# Altium PCB CH32H417QEU-R1.PcbDoc (part 2 of 6)
Units mm, origin at the board's own origin, x right, y up, seen from the top; angles counter-clockwise.
Board outline 125 x 85 mm, 4 copper layers (Top Layer, Layer 1, Layer 2, Bottom Layer), stack 0.603 mm thick; 271 components, 256 nets, 1068 pads, 903 vias.
Unrouted connection lines stored in the file: 143.
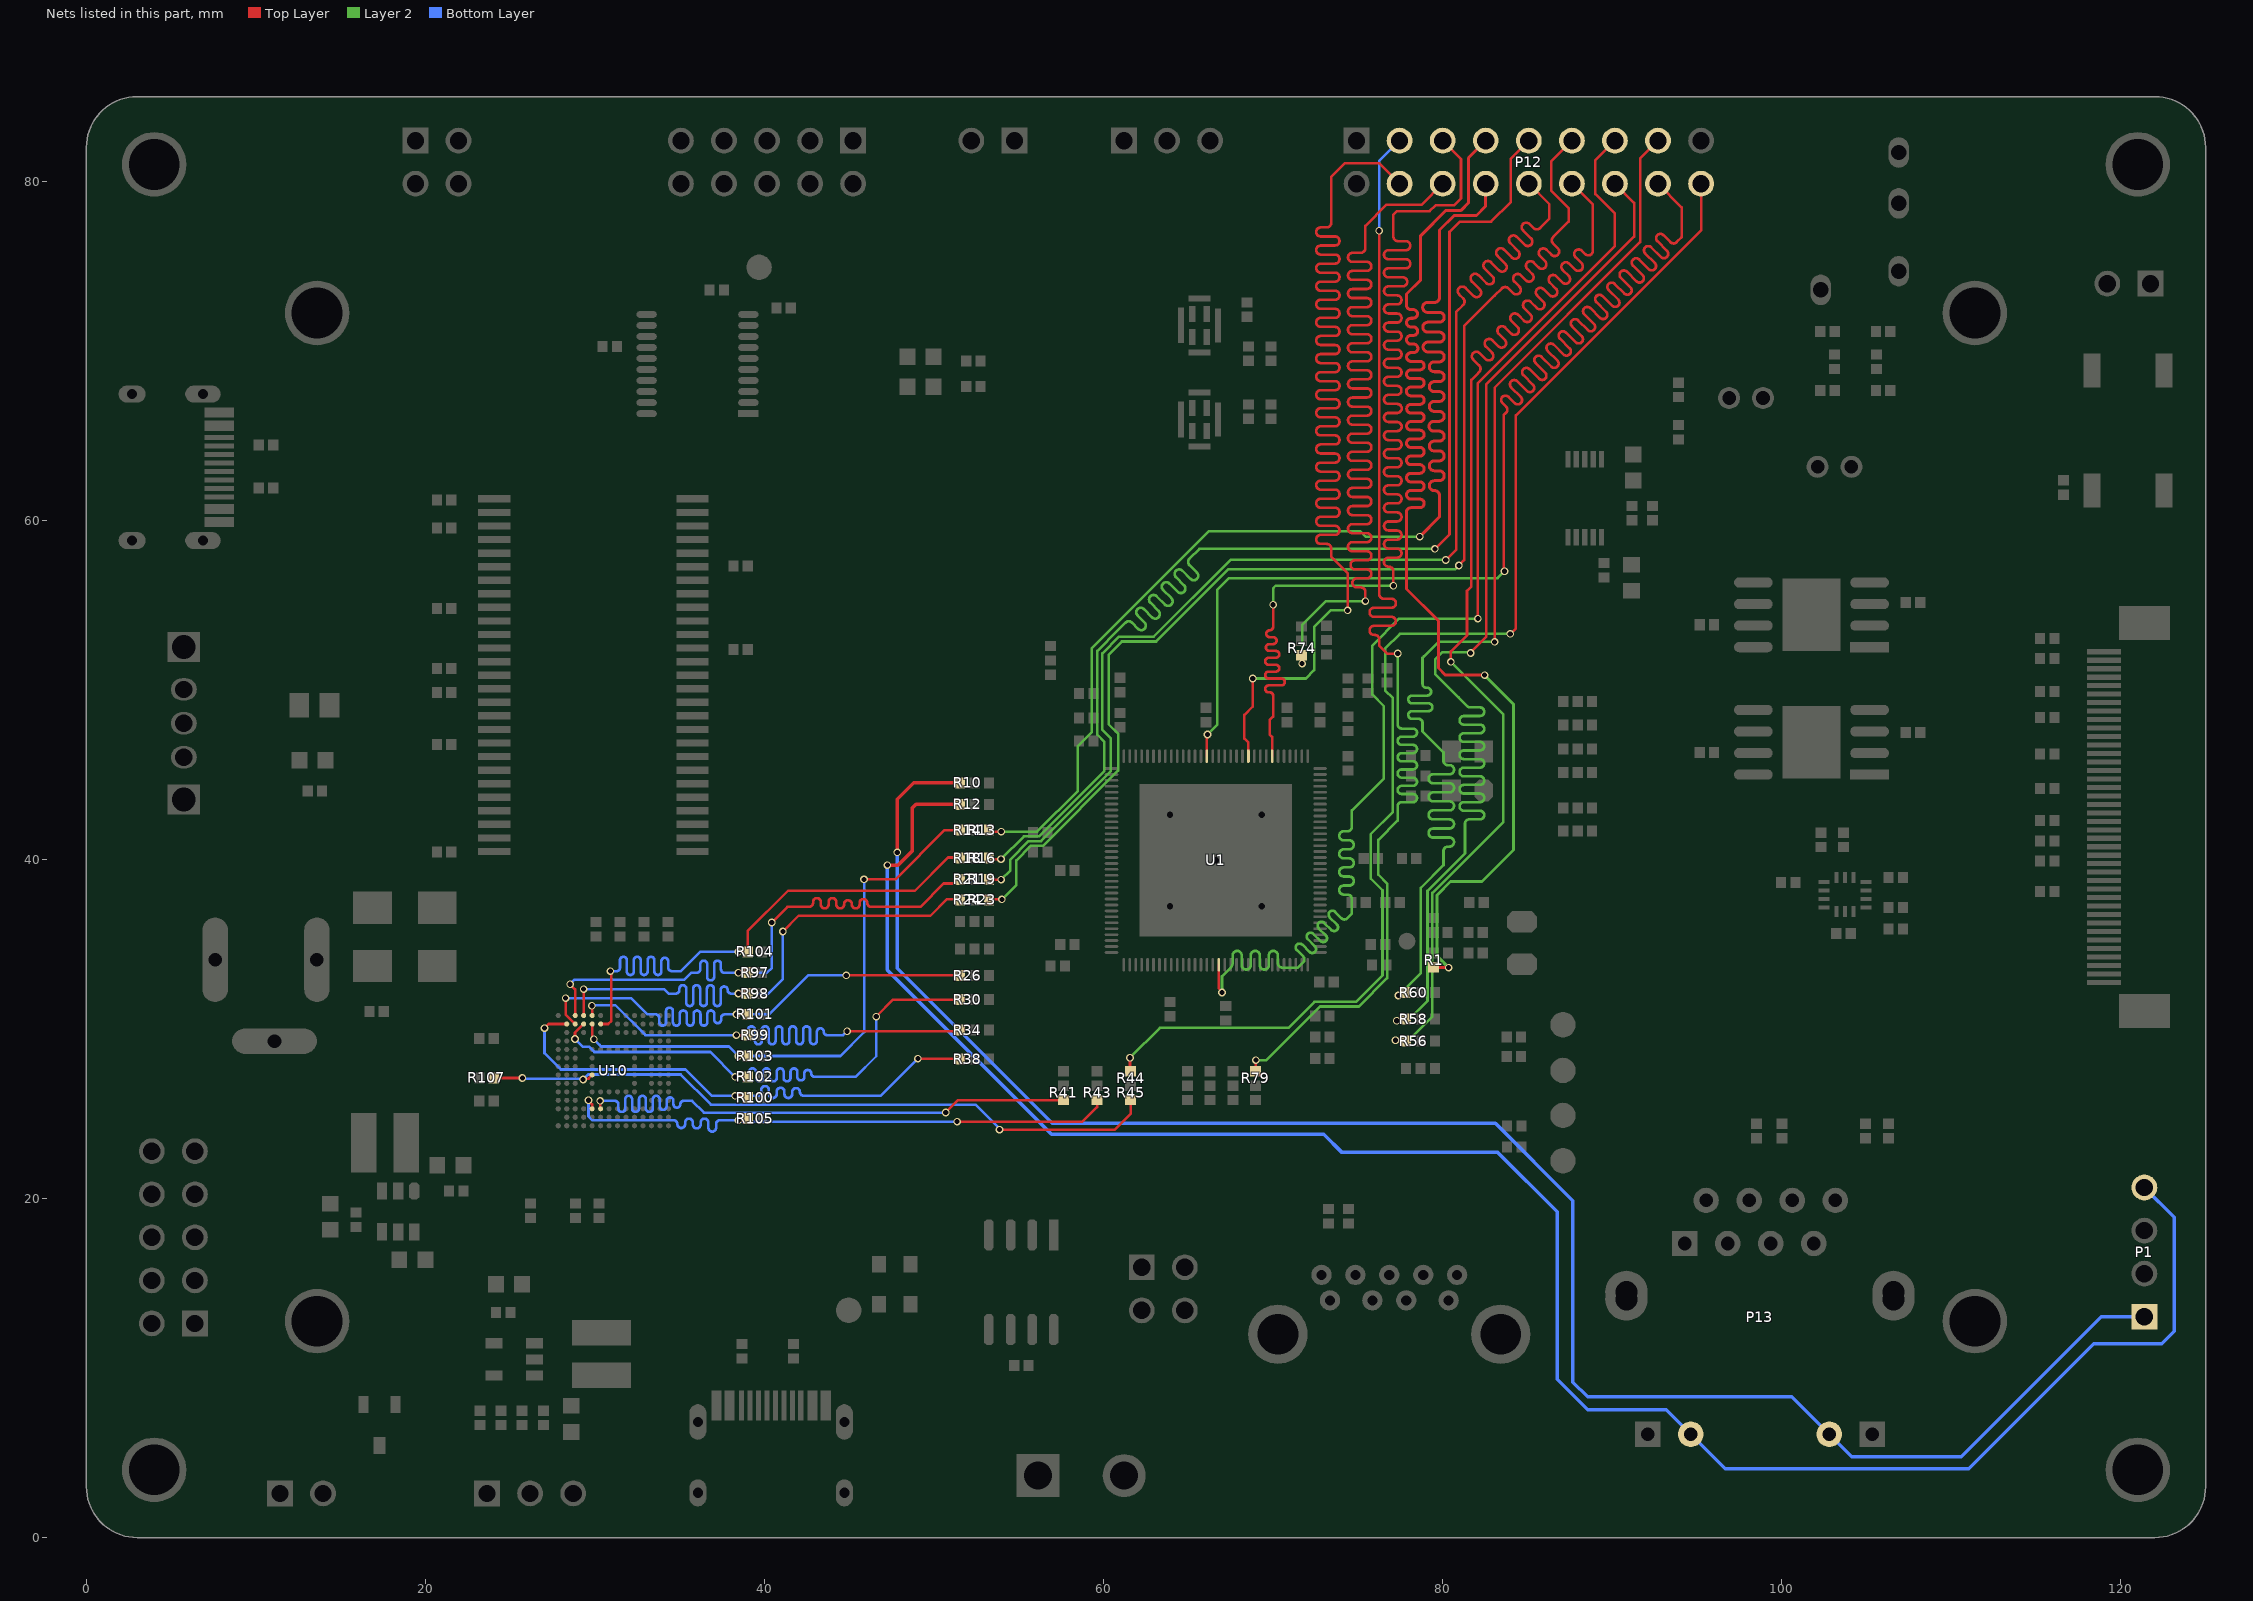
[diagram p4: the nets of this part, all layers, seen from the top]

## Via types
v1: diameter 0.45, hole 0.3, Top Layer to Bottom Layer, tented both sides, 534 vias
v2: diameter 0.5, hole 0.3, Top Layer to Bottom Layer, tented both sides, 320 vias
v3: diameter 0.711, hole 0.406, Top Layer to Bottom Layer, tented both sides, 24 vias
v4: diameter 0.508, hole 0.305, Top Layer to Bottom Layer, tented both sides, 22 vias
v5: diameter 0.7, hole 0.4, Top Layer to Bottom Layer, tented both sides, 3 vias

## Nets (pads, with @x,y where several pads share a name; then routed paths per layer and width w, separated by ;. In a path a pad name is that pad's centre, name@x,y a point inside that pad or via, vN(x,y) a via of type N, cw(c..) or ccw(c..) an arc to the next point about the centre after c; other vN are vias at no path point) (continued)
DVP_D0: P12.8 R13.1 | length 74.9
  Top Layer w0.152: R13.1@53.237,41.725 53.322,41.641 v1(53.96,41.641)
  Top Layer w0.178: v1(78.645,59.041) 79.811,60.207 79.811,61.376 79.811,61.465 ccw(c79.519,61.465) 79.519,61.757 79.504,61.757 cw(c79.504,62.05) 79.504,62.342 79.8,62.342 ccw(c79.8,62.634) 79.8,62.926 79.504,62.926 cw(c79.504,63.218) 79.504,63.51 79.8,63.51 ccw(c79.8,63.802) 79.8,64.094 79.504,64.094 cw(c79.504,64.386) 79.504,64.678 79.8,64.678 ccw(c79.8,64.971) 79.8,65.263 79.49,65.263 cw(c79.49,65.555) 79.49,65.847 79.8,65.847 ccw(c79.8,66.139) 79.8,66.431 79.504,66.431 cw(c79.504,66.723) 79.504,67.015 79.8,67.015 ccw(c79.8,67.307) 79.8,67.599 79.504,67.599 cw(c79.504,67.892) 79.504,68.184 79.8,68.184 ccw(c79.8,68.476) 79.8,68.768 79.504,68.768 cw(c79.504,69.06) 79.504,69.352 79.8,69.352 ccw(c79.8,69.644) 79.8,69.936 79.134,69.936 cw(c79.134,70.228) 79.134,70.52 79.8,70.52 ccw(c79.8,70.813) 79.8,71.105 79.118,71.105 cw(c79.118,71.397) 79.118,71.689 79.8,71.689 ccw(c79.8,71.981) 79.8,72.273 79.109,72.273 cw(c79.109,72.565) 79.109,72.857 79.519,72.857 ccw(c79.519,73.149) 79.811,73.149 79.811,74.34 79.811,77.123 80.677,77.989 81.994,77.989 82.517,78.511 P12.8@82.517,79.86
  Layer 2 w0.152: v1(53.96,41.641) 56.073,41.641 58.481,44.048 58.481,46.686 59.304,47.51 59.304,52.464 66.195,59.355 75.141,59.355 75.455,59.041 v1(78.645,59.041)
DVP_D1: P12.9 R16.1 | length 75.6
  Top Layer w0.152: R16.1@53.237,40.074 53.294,40.018 v1(53.949,40.018) ; v1(79.54,58.321) 80.399,59.18 80.399,77.018 81.008,77.627 82.862,77.627 84.02,78.785 84.02,81.34 P12.9@85.08,82.4
  Layer 2 w0.152: v1(53.949,40.018) 55.293,41.361 56.189,41.361 60.044,45.216 60.044,46.94 59.627,47.357 59.627,52.305 60.86,53.539 61.291,53.97 cw(c61.479,53.781) 61.668,53.97 62.032,53.606 ccw(c62.22,53.795) 62.409,53.606 ccw(c62.22,53.795) 62.409,53.983 62.002,54.39 cw(c62.191,54.578) 62.002,54.767 cw(c62.191,54.578) 62.379,54.767 62.861,54.285 ccw(c63.05,54.473) 63.239,54.285 ccw(c63.05,54.473) 63.239,54.662 62.757,55.144 cw(c62.945,55.333) 62.757,55.521 cw(c62.945,55.333) 63.134,55.521 63.616,55.039 ccw(c63.804,55.228) 63.993,55.039 ccw(c63.804,55.228) 63.993,55.416 63.511,55.898 cw(c63.7,56.087) 63.511,56.276 cw(c63.7,56.087) 63.888,56.276 64.37,55.794 ccw(c64.559,55.982) 64.747,55.794 ccw(c64.559,55.982) 64.747,56.171 64.265,56.653 cw(c64.454,56.841) 64.265,57.03 cw(c64.454,56.841) 64.643,57.03 65.124,56.548 ccw(c65.313,56.737) 65.502,56.548 ccw(c65.313,56.737) 65.502,56.925 65.063,57.364 cw(c65.251,57.553) 65.063,57.741 65.642,58.321 65.669,58.321 74.031,58.321 v1(79.54,58.321)
DVP_D2: P12.10 R19.1 | length 76.1
  Top Layer w0.152: R19.1@53.237,38.829 53.252,38.814 v1(53.956,38.814) ; v1(80.182,57.667) 80.812,58.296 80.812,72.314 81.159,72.661 81.213,72.715 ccw(c81.024,72.904) 81.213,73.092 80.968,73.337 cw(c81.157,73.526) 80.968,73.714 cw(c81.157,73.526) 81.345,73.714 81.815,73.245 ccw(c82.003,73.433) 82.192,73.245 ccw(c82.003,73.433) 82.192,73.622 81.722,74.092 cw(c81.911,74.28) 81.722,74.469 cw(c81.911,74.28) 82.099,74.469 82.569,73.999 ccw(c82.758,74.188) 82.946,73.999 ccw(c82.758,74.188) 82.946,74.376 82.477,74.846 cw(c82.665,75.034) 82.477,75.223 cw(c82.665,75.034) 82.854,75.223 83.323,74.753 ccw(c83.512,74.942) 83.701,74.753 ccw(c83.512,74.942) 83.701,75.131 83.231,75.6 cw(c83.42,75.789) 83.231,75.977 cw(c83.42,75.789) 83.608,75.977 84.078,75.508 ccw(c84.266,75.696) 84.455,75.508 ccw(c84.266,75.696) 84.455,75.885 83.985,76.355 cw(c84.174,76.543) 83.985,76.732 cw(c84.174,76.543) 84.362,76.732 84.832,76.262 ccw(c85.021,76.451) 85.209,76.262 ccw(c85.021,76.451) 85.209,76.639 84.74,77.109 cw(c84.928,77.298) 84.74,77.486 cw(c84.928,77.298) 85.117,77.486 85.362,77.241 ccw(c85.551,77.43) 85.739,77.241 86.293,77.795 86.293,78.647 P12.10@85.08,79.86
  Layer 2 w0.152: v1(53.956,38.814) 54.496,39.354 54.496,39.995 55.582,41.082 56.305,41.082 60.432,45.209 60.432,47.143 59.931,47.645 59.931,52.153 60.916,53.138 62.956,53.138 67.491,57.673 80.176,57.673 v1(80.182,57.667)
DVP_D3: P12.11 R23.1 | length 75.9
  Top Layer w0.152: R23.1@53.237,37.62 53.268,37.65 v1(53.999,37.65) ; v1(80.956,57.341) 81.269,57.654 81.269,71.462 83.064,73.257 83.495,73.688 cw(c83.683,73.499) 83.872,73.688 84.152,73.408 ccw(c84.34,73.597) 84.529,73.408 ccw(c84.34,73.597) 84.529,73.785 84.235,74.079 cw(c84.424,74.268) 84.235,74.456 cw(c84.424,74.268) 84.612,74.456 84.906,74.162 ccw(c85.095,74.351) 85.283,74.162 ccw(c85.095,74.351) 85.283,74.54 84.989,74.833 cw(c85.178,75.022) 84.989,75.21 cw(c85.178,75.022) 85.367,75.21 85.66,74.917 ccw(c85.849,75.105) 86.038,74.917 ccw(c85.849,75.105) 86.038,75.294 85.744,75.588 cw(c85.932,75.776) 85.744,75.965 cw(c85.932,75.776) 86.121,75.965 86.415,75.671 ccw(c86.603,75.86) 86.792,75.671 ccw(c86.603,75.86) 86.792,76.048 86.512,76.328 cw(c86.701,76.516) 86.512,76.705 87.425,77.618 87.425,78.422 86.406,79.441 86.406,81.186 P12.11@87.62,82.4
  Layer 2 w0.152: v1(53.999,37.65) 54.848,38.498 54.848,39.952 55.698,40.803 56.421,40.803 60.854,45.236 60.854,47.417 60.295,47.977 60.295,52.073 61.081,52.859 63.093,52.859 67.341,57.107 80.721,57.107 v1(80.956,57.341)
DVP_D4: P12.12 R56.1 | length 74.1
  Top Layer w0.152: v1(77.215,29.336) 77.79,29.336 R56.1@77.844,29.282 ; v1(80.484,51.656) 80.484,52.269 81.436,53.22 81.436,55.842 81.689,56.095 81.689,68.292 82.102,68.705 82.156,68.759 ccw(c81.967,68.948) 82.156,69.136 81.8,69.492 cw(c81.988,69.681) 81.8,69.869 cw(c81.988,69.681) 82.177,69.869 82.534,69.513 ccw(c82.722,69.701) 82.911,69.513 ccw(c82.722,69.701) 82.911,69.89 82.554,70.246 cw(c82.743,70.435) 82.554,70.624 cw(c82.743,70.435) 82.931,70.624 83.288,70.267 ccw(c83.476,70.456) 83.665,70.267 ccw(c83.476,70.456) 83.665,70.644 83.309,71.001 cw(c83.497,71.189) 83.309,71.378 cw(c83.497,71.189) 83.686,71.378 84.042,71.021 ccw(c84.231,71.21) 84.419,71.021 ccw(c84.231,71.21) 84.419,71.399 84.063,71.755 cw(c84.251,71.944) 84.063,72.132 cw(c84.251,71.944) 84.44,72.132 84.797,71.776 ccw(c84.985,71.964) 85.174,71.776 ccw(c84.985,71.964) 85.174,72.153 84.817,72.509 cw(c85.006,72.698) 84.817,72.887 cw(c85.006,72.698) 85.194,72.887 85.551,72.53 ccw(c85.74,72.719) 85.928,72.53 ccw(c85.74,72.719) 85.928,72.907 85.572,73.264 cw(c85.76,73.452) 85.572,73.641 cw(c85.76,73.452) 85.949,73.641 86.305,73.284 ccw(c86.494,73.473) 86.682,73.284 ccw(c86.494,73.473) 86.682,73.662 86.326,74.018 cw(c86.514,74.207) 86.326,74.395 cw(c86.514,74.207) 86.703,74.395 87.06,74.039 ccw(c87.248,74.227) 87.437,74.039 ccw(c87.248,74.227) 87.437,74.416 87.08,74.773 cw(c87.269,74.961) 87.08,75.15 cw(c87.269,74.961) 87.457,75.15 87.814,74.793 ccw(c88.003,74.982) 88.191,74.793 ccw(c88.003,74.982) 88.191,75.17 87.835,75.527 cw(c88.023,75.715) 87.835,75.904 cw(c88.023,75.715) 88.212,75.904 88.405,75.711 ccw(c88.594,75.899) 88.86,75.899 88.86,76.696 88.86,78.62 P12.12@87.387,80.093
  Layer 2 w0.152: v1(77.215,29.336) 77.99,29.336 79.385,30.732 79.385,38.031 83.576,42.222 83.576,48.564 v1(80.484,51.656)
DVP_D5: P12.13 U1.113 | length 84.8
  Top Layer w0.152: U1.113@66.791,33.792 66.791,32.397 66.985,32.203 v1(66.985,32.156) ; v1(82.073,54.203) 82.065,54.211 82.065,56.076 82.074,56.086 82.074,68.1 90.16,76.186 90.16,78.092 89.006,79.246 89.006,81.246 P12.13@90.16,82.4
  Layer 2 w0.152: v1(66.985,32.156) 66.985,33.103 67.401,33.519 67.477,33.595 ccw(c67.155,33.917) 67.61,33.917 67.61,34.342 cw(c67.877,34.342) 68.144,34.342 68.144,33.774 ccw(c68.41,33.774) 68.677,33.774 68.677,34.342 cw(c68.944,34.342) 69.21,34.342 69.21,33.774 ccw(c69.477,33.774) 69.744,33.774 69.744,34.342 cw(c70.011,34.342) 70.277,34.342 70.277,33.888 ccw(c70.544,33.888) 70.544,33.622 70.896,33.622 71.458,33.622 71.724,33.888 71.778,33.942 ccw(c71.617,34.103) 71.778,34.265 71.395,34.648 cw(c71.557,34.81) 71.395,34.971 cw(c71.557,34.81) 71.719,34.971 72.144,34.546 ccw(c72.305,34.708) 72.467,34.546 ccw(c72.305,34.708) 72.467,34.869 72.042,35.295 cw(c72.204,35.456) 72.042,35.618 cw(c72.204,35.456) 72.365,35.618 72.79,35.193 ccw(c72.952,35.354) 73.114,35.193 ccw(c72.952,35.354) 73.114,35.516 72.689,35.941 cw(c72.85,36.103) 72.689,36.264 cw(c72.85,36.103) 73.012,36.264 73.437,35.839 ccw(c73.599,36.001) 73.76,35.839 ccw(c73.599,36.001) 73.76,36.163 73.335,36.588 cw(c73.497,36.749) 73.335,36.911 cw(c73.497,36.749) 73.658,36.911 74.041,36.528 ccw(c74.203,36.69) 74.365,36.528 74.599,36.763 74.648,36.811 74.648,37.587 74.648,37.663 ccw(c74.381,37.663) 74.381,37.929 74.163,37.929 cw(c74.163,38.196) 74.163,38.463 74.492,38.463 ccw(c74.492,38.73) 74.492,38.996 74.163,38.996 cw(c74.163,39.263) 74.163,39.53 74.492,39.53 ccw(c74.492,39.796) 74.492,40.063 74.163,40.063 cw(c74.163,40.33) 74.163,40.596 74.492,40.596 ccw(c74.492,40.863) 74.492,41.13 74.163,41.13 cw(c74.163,41.397) 74.163,41.663 74.381,41.663 ccw(c74.381,41.93) 74.648,41.93 74.648,42.698 74.648,42.889 76.531,44.772 76.531,49.038 75.849,49.719 75.849,52.617 77.435,54.203 v1(82.073,54.203)
DVP_D6: P12.14 R58.1 | length 75.8
  Top Layer w0.152: v1(77.291,30.488) 77.754,30.488 R58.1@77.844,30.578 ; v1(81.647,52.177) 81.647,52.217 82.559,53.128 82.559,68.004 91.298,76.743 91.298,78.722 P12.14@90.16,79.86
  Layer 2 w0.152: v1(77.291,30.488) 77.939,30.488 79.106,31.655 79.106,38.147 81.314,40.355 81.314,41.528 81.314,42.112 cw(c81.568,42.112) 81.568,42.366 82.196,42.366 ccw(c82.196,42.62) 82.196,42.874 81.25,42.874 cw(c81.25,43.128) 81.25,43.382 82.196,43.382 ccw(c82.196,43.636) 82.196,43.89 81.25,43.89 cw(c81.25,44.144) 81.25,44.398 82.196,44.398 ccw(c82.196,44.652) 82.196,44.906 81.25,44.906 cw(c81.25,45.16) 81.25,45.414 82.196,45.414 ccw(c82.196,45.668) 82.196,45.922 81.25,45.922 cw(c81.25,46.176) 81.25,46.43 82.196,46.43 ccw(c82.196,46.684) 82.196,46.938 81.25,46.938 cw(c81.25,47.192) 81.25,47.446 82.196,47.446 ccw(c82.196,47.7) 82.196,47.954 81.25,47.954 cw(c81.25,48.208) 81.25,48.462 82.196,48.462 ccw(c82.196,48.716) 82.196,48.97 81.623,48.97 cw(c81.623,49.224) 81.444,49.044 80.931,49.557 79.551,50.936 79.551,51.803 79.965,52.216 81.608,52.216 v1(81.647,52.177)
DVP_D7: P12.15 R60.1 | length 75.8
  Top Layer w0.152: v1(77.39,31.977) 77.674,31.977 R60.1@77.844,32.147 ; v1(83.062,52.833) 83.062,67.824 91.65,76.413 91.65,81.35 P12.15@92.7,82.4
  Layer 2 w0.152: v1(77.39,31.977) 78.718,33.305 78.718,38.333 80.046,39.661 80.046,39.884 80.046,40.494 cw(c80.313,40.494) 80.313,40.761 80.406,40.761 ccw(c80.406,41.027) 80.406,41.294 79.438,41.294 cw(c79.438,41.561) 79.438,41.827 80.406,41.827 ccw(c80.406,42.094) 80.406,42.361 79.438,42.361 cw(c79.438,42.628) 79.438,42.894 80.406,42.894 ccw(c80.406,43.161) 80.406,43.428 79.438,43.428 cw(c79.438,43.694) 79.438,43.961 80.406,43.961 ccw(c80.406,44.228) 80.406,44.494 79.438,44.494 cw(c79.438,44.761) 79.438,45.028 80.406,45.028 ccw(c80.406,45.295) 80.406,45.561 80.313,45.561 cw(c80.313,45.828) 80.046,45.828 80.046,46.323 78.81,47.56 78.81,47.991 78.81,48.067 ccw(c78.581,48.067) 78.581,48.295 78.201,48.295 cw(c78.201,48.524) 78.201,48.753 79.166,48.753 ccw(c79.166,48.981) 79.166,49.21 78.201,49.21 cw(c78.201,49.438) 78.201,49.667 79.089,49.667 ccw(c79.089,49.896) 79.089,50.124 79.039,50.124 cw(c79.039,50.353) 78.81,50.353 78.81,51.889 78.898,51.977 79.754,52.833 v1(83.062,52.833)
DVP_HSYNC: P12.5 U1.39 | length 84.9
  Top Layer w0.152: U1.39@69.941,46.092 69.941,47.236 69.795,47.383 69.795,48.225 70,48.43 70,49.581 70,49.658 ccw(c69.797,49.658) 69.797,49.861 69.733,49.861 cw(c69.733,50.064) 69.733,50.267 70.482,50.267 ccw(c70.482,50.471) 70.482,50.674 69.733,50.674 cw(c69.733,50.877) 69.733,51.08 70.157,51.08 ccw(c70.157,51.283) 70.157,51.487 69.733,51.487 cw(c69.733,51.69) 69.733,51.893 70.157,51.893 ccw(c70.157,52.096) 70.157,52.299 69.773,52.299 cw(c69.773,52.503) 69.773,52.706 70,52.706 ccw(c70,52.909) 70,53.112 69.797,53.112 cw(c69.797,53.315) 69.797,53.519 ccw(c69.797,53.722) 70,53.722 70,54.235 70,55.025 v1(69.998,55.027) ; v1(77.092,56.146) 77.092,56.927 77.092,57.003 ccw(c76.825,57.003) 76.825,57.27 76.805,57.27 cw(c76.805,57.536) 76.805,57.803 77.307,57.803 ccw(c77.307,58.07) 77.307,58.336 76.805,58.336 cw(c76.805,58.603) 76.805,58.87 77.307,58.87 ccw(c77.307,59.136) 77.307,59.403 76.805,59.403 cw(c76.805,59.67) 76.805,59.937 77.307,59.937 ccw(c77.307,60.203) 77.307,60.47 76.805,60.47 cw(c76.805,60.737) 76.805,61.003 77.307,61.003 ccw(c77.307,61.27) 77.307,61.537 76.805,61.537 cw(c76.805,61.803) 76.805,62.07 77.307,62.07 ccw(c77.307,62.337) 77.307,62.604 76.805,62.604 cw(c76.805,62.87) 76.805,63.137 77.307,63.137 ccw(c77.307,63.404) 77.307,63.67 76.805,63.67 cw(c76.805,63.937) 76.805,64.204 77.307,64.204 ccw(c77.307,64.47) 77.307,64.737 76.805,64.737 cw(c76.805,65.004) 76.805,65.271 77.313,65.271 ccw(c77.313,65.537) 77.313,65.804 76.805,65.804 cw(c76.805,66.071) 76.805,66.337 77.315,66.337 ccw(c77.315,66.604) 77.315,66.871 76.805,66.871 cw(c76.805,67.137) 76.805,67.404 77.3,67.404 ccw(c77.3,67.671) 77.3,67.938 76.805,67.938 cw(c76.805,68.204) 76.805,68.471 77.307,68.471 ccw(c77.307,68.738) 77.307,69.004 76.805,69.004 cw(c76.805,69.271) 76.805,69.538 77.307,69.538 ccw(c77.307,69.804) 77.307,70.071 76.805,70.071 cw(c76.805,70.338) 76.805,70.605 77.307,70.605 ccw(c77.307,70.871) 77.307,71.138 76.805,71.138 cw(c76.805,71.405) 76.805,71.671 77.307,71.671 ccw(c77.307,71.938) 77.307,72.205 76.805,72.205 cw(c76.805,72.471) 76.805,72.738 77.307,72.738 ccw(c77.307,73.005) 77.307,73.272 76.805,73.272 cw(c76.805,73.538) 76.805,73.805 77.644,73.805 ccw(c77.644,74.072) 77.644,74.338 76.805,74.338 cw(c76.805,74.605) 76.805,74.872 77.824,74.872 ccw(c77.824,75.138) 77.824,75.405 76.805,75.405 cw(c76.805,75.672) 76.805,75.939 77.824,75.939 ccw(c77.824,76.205) 77.824,76.472 77.359,76.472 cw(c77.359,76.739) 77.092,76.739 77.092,77.862 77.092,78.032 77.298,78.239 79.232,78.239 79.579,78.585 80.674,78.585 81.082,78.994 81.082,81.318 P12.5@80,82.4
  Layer 2 w0.152: v1(69.998,55.027) 69.998,55.997 70.147,56.146 v1(77.092,56.146)
DVP_PCLK: P12.16 U1.50 | length 84.9
  Top Layer w0.152: U1.50@66.091,46.092 66.091,47.336 v1(66.129,47.373) ; v1(83.648,57.003) 83.596,57.056 83.596,66.208 83.685,66.298 83.739,66.352 ccw(c83.559,66.531) 83.739,66.711 83.521,66.929 cw(c83.7,67.109) 83.521,67.288 cw(c83.7,67.109) 83.88,67.288 84.249,66.92 ccw(c84.428,67.099) 84.608,66.92 ccw(c84.428,67.099) 84.608,67.279 84.041,67.846 cw(c84.22,68.026) 84.041,68.205 cw(c84.22,68.026) 84.4,68.205 84.967,67.638 ccw(c85.147,67.818) 85.326,67.638 ccw(c85.147,67.818) 85.326,67.997 84.759,68.564 cw(c84.939,68.744) 84.759,68.924 cw(c84.939,68.744) 85.118,68.924 85.686,68.356 ccw(c85.865,68.536) 86.045,68.356 ccw(c85.865,68.536) 86.045,68.716 85.478,69.283 cw(c85.657,69.462) 85.478,69.642 cw(c85.657,69.462) 85.837,69.642 86.404,69.075 ccw(c86.584,69.254) 86.763,69.075 ccw(c86.584,69.254) 86.763,69.434 86.196,70.001 cw(c86.376,70.181) 86.196,70.36 cw(c86.376,70.181) 86.555,70.36 87.122,69.793 ccw(c87.302,69.973) 87.482,69.793 ccw(c87.302,69.973) 87.482,70.152 86.914,70.72 cw(c87.094,70.899) 86.914,71.079 cw(c87.094,70.899) 87.274,71.079 87.841,70.512 ccw(c88.02,70.691) 88.2,70.512 ccw(c88.02,70.691) 88.2,70.871 87.633,71.438 cw(c87.812,71.618) 87.633,71.797 cw(c87.812,71.618) 87.992,71.797 88.559,71.23 ccw(c88.739,71.41) 88.918,71.23 ccw(c88.739,71.41) 88.918,71.589 88.351,72.157 cw(c88.531,72.336) 88.351,72.516 cw(c88.531,72.336) 88.71,72.516 89.278,71.949 ccw(c89.457,72.128) 89.637,71.949 ccw(c89.457,72.128) 89.637,72.308 89.07,72.875 cw(c89.249,73.055) 89.07,73.234 cw(c89.249,73.055) 89.429,73.234 89.996,72.667 ccw(c90.176,72.847) 90.355,72.667 ccw(c90.176,72.847) 90.355,73.026 89.788,73.593 cw(c89.968,73.773) 89.788,73.953 cw(c89.968,73.773) 90.147,73.953 90.714,73.385 ccw(c90.894,73.565) 91.074,73.385 ccw(c90.894,73.565) 91.074,73.745 90.507,74.312 cw(c90.686,74.491) 90.507,74.671 cw(c90.686,74.491) 90.866,74.671 91.433,74.104 ccw(c91.613,74.283) 91.792,74.104 ccw(c91.613,74.283) 91.792,74.463 91.225,75.03 cw(c91.405,75.21) 91.225,75.389 cw(c91.405,75.21) 91.584,75.389 92.151,74.822 ccw(c92.331,75.002) 92.511,74.822 ccw(c92.331,75.002) 92.511,75.181 91.943,75.749 cw(c92.123,75.928) 91.943,76.108 cw(c92.123,75.928) 92.303,76.108 92.87,75.541 ccw(c93.049,75.72) 93.229,75.541 ccw(c93.049,75.72) 93.229,75.9 92.662,76.467 cw(c92.841,76.647) 92.662,76.826 cw(c92.841,76.647) 93.021,76.826 93.438,76.41 ccw(c93.617,76.589) 93.797,76.41 94.072,76.684 94.095,76.708 94.095,78.465 P12.16@92.7,79.86
  Layer 2 w0.152: v1(66.129,47.373) 66.7,47.945 66.7,55.901 67.398,56.599 83.245,56.599 v1(83.648,57.003)
DVP_PWDN: P12.18 R44.1 | length 77
  Top Layer w0.152: v1(61.554,28.306) 61.554,27.546 R44.1@61.594,27.507 ; v1(83.985,53.305) 84.312,53.632 84.312,66.186 95.24,77.113 P12.18@95.24,79.86
  Layer 2 w0.152: v1(61.554,28.306) 63.318,30.07 70.893,30.07 72.428,31.605 74.884,31.605 76.449,33.17 76.449,38.184 75.757,38.875 75.757,41.5 77.064,42.806 77.064,49.517 76.604,49.977 76.604,52.437 77.472,53.305 82.253,53.305 v1(83.985,53.305)
DVP_RESET: P12.7 R1.1 | length 77
  Top Layer w0.178: R1.1@79.46,33.617 v1(80.349,33.617) ; v1(82.472,50.871) 80.168,50.871 79.747,51.292 79.747,54.075 77.866,55.956 77.866,58.881 77.866,60.494 cw(c78.12,60.494) 78.12,60.748 78.653,60.748 ccw(c78.653,61.002) 78.653,61.256 78.12,61.256 cw(c78.12,61.51) 78.12,61.764 78.653,61.764 ccw(c78.653,62.018) 78.653,62.272 78.12,62.272 cw(c78.12,62.526) 78.12,62.78 78.653,62.78 ccw(c78.653,63.034) 78.653,63.288 78.12,63.288 cw(c78.12,63.542) 78.12,63.796 78.653,63.796 ccw(c78.653,64.05) 78.653,64.304 78.12,64.304 cw(c78.12,64.558) 78.12,64.812 78.653,64.812 ccw(c78.653,65.066) 78.653,65.32 78.126,65.32 cw(c78.126,65.574) 78.126,65.828 78.653,65.828 ccw(c78.653,66.082) 78.653,66.336 78.128,66.336 cw(c78.128,66.59) 78.128,66.844 78.653,66.844 ccw(c78.653,67.098) 78.653,67.352 78.113,67.352 cw(c78.113,67.606) 78.113,67.86 78.653,67.86 ccw(c78.653,68.114) 78.653,68.368 78.119,68.368 cw(c78.119,68.622) 78.119,68.876 78.653,68.876 ccw(c78.653,69.13) 78.653,69.384 78.12,69.384 cw(c78.12,69.638) 78.12,69.892 78.283,69.892 ccw(c78.283,70.146) 78.283,70.4 78.12,70.4 cw(c78.12,70.654) 78.12,70.908 78.267,70.908 ccw(c78.267,71.162) 78.267,71.416 78.12,71.416 cw(c78.12,71.67) 78.12,71.924 78.258,71.924 ccw(c78.258,72.178) 78.258,72.432 78.12,72.432 cw(c78.12,72.686) 77.866,72.686 77.866,73.318 77.866,73.348 78.703,74.185 78.703,76.798 80.199,78.293 81.09,78.293 81.527,78.73 81.527,81.387 P12.7@82.701,82.561
  Layer 2 w0.178: v1(80.349,33.617) 79.677,34.29 79.677,37.91 80.467,38.7 82.317,38.7 84.173,40.557 84.173,49.161 82.472,50.862 v1(82.472,50.871)
DVP_SCL: P12.4 U1.43 | length 84.9
  Top Layer w0.152: U1.43@68.541,46.092 68.541,46.891 68.307,47.126 68.307,48.53 68.797,49.02 v1(68.797,50.675) ; v1(74.393,54.692) 74.393,56.89 73.424,57.86 73.424,58.269 73.424,58.345 ccw(c73.157,58.345) 73.157,58.612 72.805,58.612 cw(c72.805,58.879) 72.805,59.145 73.65,59.145 ccw(c73.65,59.412) 73.65,59.679 72.805,59.679 cw(c72.805,59.946) 72.805,60.212 73.65,60.212 ccw(c73.65,60.479) 73.65,60.746 72.805,60.746 cw(c72.805,61.012) 72.805,61.279 73.65,61.279 ccw(c73.65,61.546) 73.65,61.812 72.805,61.812 cw(c72.805,62.079) 72.805,62.346 73.65,62.346 ccw(c73.65,62.613) 73.65,62.879 72.805,62.879 cw(c72.805,63.146) 72.805,63.413 73.65,63.413 ccw(c73.65,63.679) 73.65,63.946 72.805,63.946 cw(c72.805,64.213) 72.805,64.479 73.65,64.479 ccw(c73.65,64.746) 73.65,65.013 72.805,65.013 cw(c72.805,65.28) 72.805,65.546 73.65,65.546 ccw(c73.65,65.813) 73.65,66.08 72.805,66.08 cw(c72.805,66.346) 72.805,66.613 73.65,66.613 ccw(c73.65,66.88) 73.65,67.146 72.805,67.146 cw(c72.805,67.413) 72.805,67.68 73.65,67.68 ccw(c73.65,67.947) 73.65,68.213 72.805,68.213 cw(c72.805,68.48) 72.805,68.747 73.65,68.747 ccw(c73.65,69.013) 73.65,69.28 72.805,69.28 cw(c72.805,69.547) 72.805,69.813 73.65,69.813 ccw(c73.65,70.08) 73.65,70.347 72.805,70.347 cw(c72.805,70.614) 72.805,70.88 73.65,70.88 ccw(c73.65,71.147) 73.65,71.414 72.805,71.414 cw(c72.805,71.68) 72.805,71.947 73.65,71.947 ccw(c73.65,72.214) 73.65,72.48 72.805,72.48 cw(c72.805,72.747) 72.805,73.014 73.65,73.014 ccw(c73.65,73.281) 73.65,73.547 72.805,73.547 cw(c72.805,73.814) 72.805,74.081 73.65,74.081 ccw(c73.65,74.347) 73.65,74.614 72.805,74.614 cw(c72.805,74.881) 72.805,75.147 73.65,75.147 ccw(c73.65,75.414) 73.65,75.681 72.805,75.681 cw(c72.805,75.948) 72.805,76.214 73.65,76.214 ccw(c73.65,76.481) 73.65,76.748 72.805,76.748 cw(c72.805,77.014) 72.805,77.281 73.157,77.281 ccw(c73.157,77.548) 73.424,77.548 73.424,78.63 73.424,80.247 74.25,81.074 76.246,81.074 P12.4@77.46,79.86
  Layer 2 w0.152: v1(68.797,50.675) 71.928,50.675 72.422,51.17 72.422,53.723 73.391,54.692 v1(74.393,54.692)
DVP_SDA: P12.6 R74.1 | length 77
  Top Layer w0.152: R74.1@71.683,52.047 71.712,52.018 v1(71.712,51.55) ; v1(75.438,55.239) 75.438,55.705 75.438,55.781 ccw(c75.172,55.781) 75.172,56.047 74.939,56.047 cw(c74.939,56.314) 74.939,56.581 75.525,56.581 ccw(c75.525,56.848) 75.525,57.114 74.831,57.114 cw(c74.831,57.381) 74.831,57.648 75.525,57.648 ccw(c75.525,57.914) 75.525,58.181 74.679,58.181 cw(c74.679,58.448) 74.679,58.714 75.525,58.714 ccw(c75.525,58.981) 75.525,59.248 74.679,59.248 cw(c74.679,59.515) 74.679,59.781 75.525,59.781 ccw(c75.525,60.048) 75.525,60.315 74.679,60.315 cw(c74.679,60.581) 74.679,60.848 75.525,60.848 ccw(c75.525,61.115) 75.525,61.381 74.679,61.381 cw(c74.679,61.648) 74.679,61.915 75.525,61.915 ccw(c75.525,62.182) 75.525,62.448 74.679,62.448 cw(c74.679,62.715) 74.679,62.982 75.525,62.982 ccw(c75.525,63.248) 75.525,63.515 74.679,63.515 cw(c74.679,63.782) 74.679,64.048 75.525,64.048 ccw(c75.525,64.315) 75.525,64.582 74.679,64.582 cw(c74.679,64.849) 74.679,65.115 75.525,65.115 ccw(c75.525,65.382) 75.525,65.649 74.679,65.649 cw(c74.679,65.915) 74.679,66.182 75.525,66.182 ccw(c75.525,66.449) 75.525,66.715 74.679,66.715 cw(c74.679,66.982) 74.679,67.249 75.525,67.249 ccw(c75.525,67.516) 75.525,67.782 74.679,67.782 cw(c74.679,68.049) 74.679,68.316 75.525,68.316 ccw(c75.525,68.582) 75.525,68.849 74.679,68.849 cw(c74.679,69.116) 74.679,69.382 75.525,69.382 ccw(c75.525,69.649) 75.525,69.916 74.679,69.916 cw(c74.679,70.183) 74.679,70.449 75.525,70.449 ccw(c75.525,70.716) 75.525,70.983 74.679,70.983 cw(c74.679,71.249) 74.679,71.516 75.525,71.516 ccw(c75.525,71.783) 75.525,72.049 74.679,72.049 cw(c74.679,72.316) 74.679,72.583 75.525,72.583 ccw(c75.525,72.85) 75.525,73.116 74.679,73.116 cw(c74.679,73.383) 74.679,73.65 75.525,73.65 ccw(c75.525,73.916) 75.525,74.183 74.679,74.183 cw(c74.679,74.45) 74.679,74.716 75.525,74.716 ccw(c75.525,74.983) 75.525,75.25 74.679,75.25 cw(c74.679,75.517) 74.679,75.783 75.172,75.783 ccw(c75.172,76.05) 75.438,76.05 75.438,76.83 75.438,77.372 76.697,78.631 78.771,78.631 P12.6@80,79.86
  Layer 2 w0.152: v1(71.712,51.55) 71.712,53.821 73.13,55.239 v1(75.438,55.239)
DVP_VSYNC: P12.3 R79.1 | length 76.3
  Top Layer w0.152: R79.1@68.958,27.507 68.981,27.529 v1(68.981,28.16) ; v1(76.25,77.087) 76.259,77.078 76.259,57.17 76.259,55.646 ccw(c76.526,55.646) 76.526,55.379 76.97,55.379 cw(c76.97,55.112) 76.97,54.846 75.952,54.846 ccw(c75.952,54.579) 75.952,54.312 76.97,54.312 cw(c76.97,54.045) 76.97,53.779 75.952,53.779 ccw(c75.952,53.512) 75.952,53.245 75.992,53.245 cw(c75.992,52.979) 76.259,52.979 76.259,52.902 76.259,52.605 76.725,52.139 77.345,52.139 v1(77.352,52.146)
  Layer 2 w0.152: v1(68.981,28.16) 69.602,28.16 72.768,31.326 75.053,31.326 76.728,33.001 76.728,38.571 76.2,39.098 76.2,41.156 77.343,42.299 77.343,42.579 77.343,42.655 77.343,43.138 cw(c77.585,43.138) 77.585,43.379 78.245,43.379 ccw(c78.245,43.62) 78.245,43.861 77.585,43.861 cw(c77.585,44.103) 77.585,44.344 78.245,44.344 ccw(c78.245,44.585) 78.245,44.827 77.585,44.827 cw(c77.585,45.068) 77.585,45.309 78.245,45.309 ccw(c78.245,45.551) 78.245,45.792 77.585,45.792 cw(c77.585,46.033) 77.585,46.274 78.245,46.274 ccw(c78.245,46.516) 78.245,46.757 77.585,46.757 cw(c77.585,46.998) 77.585,47.24 78.245,47.24 ccw(c78.245,47.481) 78.245,47.722 77.585,47.722 cw(c77.585,47.964) 77.343,47.964 77.343,48.295 77.343,48.371 77.343,52.138 v1(77.352,52.146)
  Bottom Layer w0.152: v1(76.25,77.087) 76.25,81.19 P12.3@77.46,82.4
ELED0: P1.1 P13.11 R10.1 | length 109.3
  Top Layer w0.203: v1(47.829,40.418) 47.829,43.557 48.791,44.519 R10.1@51.537,44.519
  Bottom Layer w0.203: v1(47.829,40.418) 47.829,33.573 56.966,24.436 83.115,24.436 87.684,19.868 87.684,9.174 88.558,8.3 100.599,8.3 P13.11@102.803,6.096 104.118,4.781 110.584,4.781 118.833,13.03 P1.1@121.387,13.03
ELED1: P1.4 P13.10 R12.1 | length 119.9
  Top Layer w0.203: v1(47.241,39.667) 47.26,39.647 47.872,39.647 48.7,40.475 48.7,43.013 48.936,43.249 R12.1@51.537,43.249
  Bottom Layer w0.203: v1(47.241,39.667) 47.241,33.479 56.928,23.792 72.985,23.792 74.059,22.718 83.242,22.718 86.75,19.209 86.75,9.339 88.548,7.54 93.189,7.54 P13.10@94.633,6.096 96.672,4.057 111.031,4.057 118.409,11.435 122.423,11.435 123.151,12.163 123.151,18.885 P1.4@121.387,20.65
eMMC_CLK: R41.1 U10.M6 | length 34.7
  Top Layer w0.152: v1(30.3,25.765) 30.317,25.749 30.317,25.311 U10.M6@30.333,25.294 ; v1(50.687,25.072) 51.422,25.807 R41.1@57.632,25.807
  Bottom Layer w0.152: v1(30.3,25.765) 30.69,25.765 31.173,25.765 cw(c31.173,25.562) 31.376,25.562 31.376,25.313 ccw(c31.579,25.313) 31.782,25.313 31.782,25.857 cw(c31.986,25.857) 32.189,25.857 32.189,25.313 ccw(c32.392,25.313) 32.595,25.313 32.595,25.857 cw(c32.798,25.857) 33.002,25.857 33.002,25.313 ccw(c33.205,25.313) 33.408,25.313 33.408,25.857 cw(c33.611,25.857) 33.814,25.857 33.814,25.431 ccw(c34.018,25.431) 34.221,25.431 34.221,25.765 cw(c34.424,25.765) 34.627,25.765 34.627,25.562 ccw(c34.83,25.562) 35.034,25.562 cw(c35.237,25.562) 35.237,25.765 35.572,25.765 35.723,25.765 36.415,25.072 v1(50.687,25.072)
eMMC_CMD: R43.1 R105.1 U10.M5 | length 35.5
  Top Layer w0.152: v1(29.615,25.799) 29.615,25.779 29.833,25.561 U10.M5@29.833,25.294 ; v1(38.455,24.619) 38.903,24.619 R105.1@39.005,24.721 ; v1(51.359,24.538) 58.751,24.538 59.613,25.4 R43.1@59.613,25.807
  Bottom Layer w0.152: v1(29.615,25.799) 29.615,24.839 29.835,24.619 30.29,24.619 34.628,24.619 cw(c34.628,24.39) 34.857,24.39 ccw(c35.086,24.39) 35.314,24.39 35.314,24.486 cw(c35.543,24.486) 35.771,24.486 35.771,24.366 ccw(c36,24.366) 36.229,24.366 36.229,24.486 cw(c36.457,24.486) 36.686,24.486 36.686,24.179 ccw(c36.914,24.179) 37.143,24.179 37.143,24.39 cw(c37.372,24.39) 37.372,24.619 37.448,24.619 v1(38.455,24.619) 38.512,24.562 38.67,24.562 38.693,24.538 v1(51.359,24.538)
eMMC_DATA0: R21.1 R97.1 U10.A3 | length 35.5
  Top Layer w0.152: v1(28.535,32.64) 28.833,32.342 U10.A3@28.833,30.794 ; v1(38.455,33.32) R97.1@39.005,33.32 ; v1(40.426,36.279) 41.356,37.209 42.556,37.209 42.632,37.209 ccw(c42.632,37.437) 42.861,37.437 42.861,37.495 cw(c43.09,37.495) 43.318,37.495 43.318,37.344 ccw(c43.547,37.344) 43.775,37.344 43.775,37.495 cw(c44.004,37.495) 44.233,37.495 44.233,37.344 ccw(c44.461,37.344) 44.69,37.344 44.69,37.362 cw(c44.918,37.362) 45.147,37.362 45.147,37.344 ccw(c45.376,37.344) 45.604,37.344 45.604,37.437 cw(c45.833,37.437) 46.061,37.437 ccw(c46.29,37.437) 46.29,37.209 47.186,37.209 49.19,37.209 50.562,38.58 51.314,38.58 51.537,38.804 R21.1@51.537,38.829
  Bottom Layer w0.152: v1(28.535,32.64) 28.535,32.651 28.791,32.907 35.267,32.907 35.679,33.32 35.93,33.32 36.007,33.32 ccw(c36.007,33.523) 36.21,33.523 36.21,33.827 cw(c36.413,33.827) 36.616,33.827 36.616,33.067 ccw(c36.819,33.067) 37.023,33.067 37.023,33.827 cw(c37.226,33.827) 37.429,33.827 37.429,33.523 ccw(c37.632,33.523) 37.632,33.32 38.243,33.32 v1(38.455,33.32) 40.138,33.32 40.426,33.608 v1(40.426,36.279)
eMMC_DATA1: R24.1 R98.1 U10.A4 | length 35.2
  Top Layer w0.152: v1(29.329,32.352) 29.331,32.35 29.331,30.796 U10.A4@29.333,30.794 ; v1(38.455,32.091) R98.1@39.005,32.091 ; v1(41.083,35.748) 42.016,36.681 49.779,36.681 50.756,37.658 51.499,37.658 R24.1@51.537,37.62
  Bottom Layer w0.152: v1(29.329,32.352) 34.081,32.352 34.342,32.091 34.697,32.091 34.773,32.091 ccw(c34.773,32.294) 34.976,32.294 34.976,32.381 cw(c35.18,32.381) 35.383,32.381 35.383,31.557 ccw(c35.586,31.557) 35.789,31.557 35.789,32.381 cw(c35.992,32.381) 36.196,32.381 36.196,31.557 ccw(c36.399,31.557) 36.602,31.557 36.602,32.381 cw(c36.805,32.381) 37.008,32.381 37.008,31.557 ccw(c37.212,31.557) 37.415,31.557 37.415,32.303 cw(c37.618,32.303) 37.821,32.303 37.821,32.294 ccw(c38.024,32.294) 38.024,32.091 v1(38.455,32.091) 40.22,32.091 41.083,32.955 v1(41.083,35.748)
eMMC_DATA2: R34.1 R99.1 U10.A5 | length 33.1
  Top Layer w0.152: v1(29.818,31.371) 29.825,31.364 29.825,30.802 U10.A5@29.833,30.794 ; v1(38.334,29.634) R99.1@39.005,29.634 ; v1(44.872,29.87) 51.476,29.87 R34.1@51.537,29.932
  Bottom Layer w0.152: v1(29.818,31.371) 29.853,31.406 31.193,31.406 32.965,29.634 v1(38.334,29.634) 38.745,29.634 38.821,29.634 ccw(c38.821,29.838) 39.024,29.838 39.024,29.952 cw(c39.227,29.952) 39.431,29.952 39.431,29.3 ccw(c39.634,29.3) 39.837,29.3 39.837,29.952 cw(c40.04,29.952) 40.243,29.952 40.243,29.3 ccw(c40.447,29.3) 40.65,29.3 40.65,29.952 cw(c40.853,29.952) 41.056,29.952 41.056,29.3 ccw(c41.259,29.3) 41.463,29.3 41.463,29.952 cw(c41.666,29.952) 41.869,29.952 41.869,29.3 ccw(c42.072,29.3) 42.275,29.3 42.275,29.952 cw(c42.479,29.952) 42.682,29.952 42.682,29.305 ccw(c42.885,29.305) 43.088,29.305 43.088,29.838 cw(c43.291,29.838) 43.495,29.838 ccw(c43.698,29.838) 43.698,29.634 44.374,29.634 44.636,29.634 v1(44.872,29.87)
eMMC_DATA3: R38.1 R100.1 U10.B2 | length 32.5
  Top Layer w0.152: v1(27.018,30.053) 27.26,30.294 U10.B2@28.333,30.294 ; v1@38.268,26.061 38.893,26.061 R100.1@39.005,25.949 ; v1(49.044,28.249) 51.509,28.249 R38.1@51.537,28.221
  Bottom Layer w0.152: v1(27.018,30.053) 27.018,28.573 27.982,27.61 35.338,27.61 36.892,26.056 v1(38.263,26.056) 39.497,26.056 39.573,26.056 ccw(c39.573,26.285) 39.802,26.285 39.802,26.404 cw(c40.031,26.404) 40.259,26.404 40.259,26.157 ccw(c40.488,26.157) 40.716,26.157 40.716,26.302 cw(c40.945,26.302) 41.174,26.302 41.174,26.157 ccw(c41.402,26.157) 41.631,26.157 41.631,26.285 cw(c41.859,26.285) 42.088,26.285 ccw(c42.317,26.285) 42.317,26.056 45.53,26.056 46.85,26.056 v1(49.044,28.249)
eMMC_DATA4: R26.1 R101.1 U10.B3 | length 33.8
  Top Layer w0.152: v1(28.268,31.825) 28.268,30.859 U10.B3@28.833,30.294 ; v1(38.347,30.863) R101.1@39.005,30.863 ; v1(44.819,33.164) 51.522,33.164 R26.1@51.537,33.148
  Bottom Layer w0.152: v1(28.268,31.825) 32.124,31.825 33.086,30.863 33.096,30.863 33.579,30.863 cw(c33.579,30.66) 33.782,30.66 33.782,30.403 ccw(c33.985,30.403) 34.189,30.403 34.189,31.057 cw(c34.392,31.057) 34.595,31.057 34.595,30.403 ccw(c34.798,30.403) 35.001,30.403 35.001,30.887 cw(c35.205,30.887) 35.408,30.887 35.408,30.403 ccw(c35.611,30.403) 35.814,30.403 35.814,30.887 cw(c36.017,30.887) 36.221,30.887 36.221,30.403 ccw(c36.424,30.403) 36.627,30.403 36.627,30.887 cw(c36.83,30.887) 37.033,30.887 37.033,30.55 ccw(c37.237,30.55) 37.44,30.55 37.44,30.66 cw(c37.643,30.66) 37.643,30.863 37.996,30.863 v1(38.347,30.863) 40.268,30.863 42.568,33.164 v1(44.819,33.164)
eMMC_DATA5: R30.1 R102.1 U10.B4 | length 33.8
  Top Layer w0.152: v1(28.821,29.413) 28.821,29.782 U10.B4@29.333,30.294 ; v1(38.269,27.178) R102.1@39.005,27.178 ; v1(46.588,30.728) 47.589,31.729 51.532,31.729 R30.1@51.537,31.735
  Bottom Layer w0.152: v1(28.821,29.413) 29.273,28.96 29.643,28.96 29.961,28.642 36.805,28.642 v1(38.269,27.178) 38.814,27.178 38.89,27.178 ccw(c38.89,27.381) 39.093,27.381 39.093,27.471 cw(c39.296,27.471) 39.5,27.471 39.5,27.115 ccw(c39.703,27.115) 39.906,27.115 39.906,27.471 cw(c40.109,27.471) 40.312,27.471 40.312,27.115 ccw(c40.516,27.115) 40.719,27.115 40.719,27.471 cw(c40.922,27.471) 41.125,27.471 41.125,27.115 ccw(c41.328,27.115) 41.532,27.115 41.532,27.471 cw(c41.735,27.471) 41.938,27.471 41.938,27.173 ccw(c42.141,27.173) 42.344,27.173 42.344,27.381 cw(c42.548,27.381) 42.751,27.381 ccw(c42.954,27.381) 42.954,27.178 44.873,27.178 45.372,27.178 46.588,28.394 v1(46.588,30.728)
eMMC_DATA6: R14.1 R103.1 U10.B5 | length 34.3
  Top Layer w0.152: U10.B5@29.833,30.294 29.833,29.58 29.937,29.476 v1(29.937,29.395) ; v1(38.455,28.406) R103.1@39.005,28.406 ; v1(45.863,38.83) 47.714,38.83 50.609,41.725 R14.1@51.537,41.725
  Bottom Layer w0.152: v1(29.937,29.395) 30.271,29.061 30.363,28.969 37.893,28.969 v1(38.455,28.406) 44.467,28.406 45.881,29.82 45.881,38.812 v1(45.863,38.83)
eMMC_DATA7: R18.1 R104.1 U10.B6 | length 34.4
  Top Layer w0.152: U10.B6@30.333,30.294 30.773,30.294 30.961,30.483 30.961,33.36 v1(30.905,33.416) ; v1(38.455,34.548) R104.1@39.005,34.548 39.005,35.769 41.391,38.154 48.868,38.154 50.83,40.117 51.495,40.117 R18.1@51.537,40.074
  Bottom Layer w0.152: v1(30.905,33.416) 31.194,33.416 31.27,33.416 ccw(c31.27,33.619) 31.474,33.619 31.474,34.058 cw(c31.677,34.058) 31.88,34.058 31.88,33.39 ccw(c32.083,33.39) 32.286,33.39 32.286,34.058 cw(c32.49,34.058) 32.693,34.058 32.693,33.39 ccw(c32.896,33.39) 33.099,33.39 33.099,34.058 cw(c33.302,34.058) 33.506,34.058 33.506,33.39 ccw(c33.709,33.39) 33.912,33.39 33.912,33.997 cw(c34.115,33.997) 34.318,33.997 34.318,33.619 ccw(c34.522,33.619) 34.522,33.416 34.898,33.416 35.064,33.416 36.196,34.548 v1(38.455,34.548)
eMMC_DQS: R45.1 R107.1 U10.H5 | length 41
  Top Layer w0.152: R107.1@24.024,27.111 v1(25.714,27.111) ; v1(29.302,27.02) 29.359,27.077 29.615,27.077 U10.H5@29.833,27.294 ; v1(53.858,24.066) 60.661,24.066 61.594,24.999 R45.1@61.594,25.807
  Bottom Layer w0.152: v1(25.714,27.111) 25.759,27.065 29.257,27.065 v1(29.302,27.02) 29.6,27.318 35.049,27.318 36.833,25.534 52.455,25.534 53.858,24.132 v1(53.858,24.066)